# Altium PCB STM32F103C8T6-带屏幕 - Footprint.PcbDoc
Units mil, origin at the board's own origin, x right, y up, seen from the top; angles counter-clockwise.
Board outline 2100 x 700 mil, 2 copper layers (Top Layer, Bottom Layer); 5 components, 0 nets, 122 pads, 0 vias.
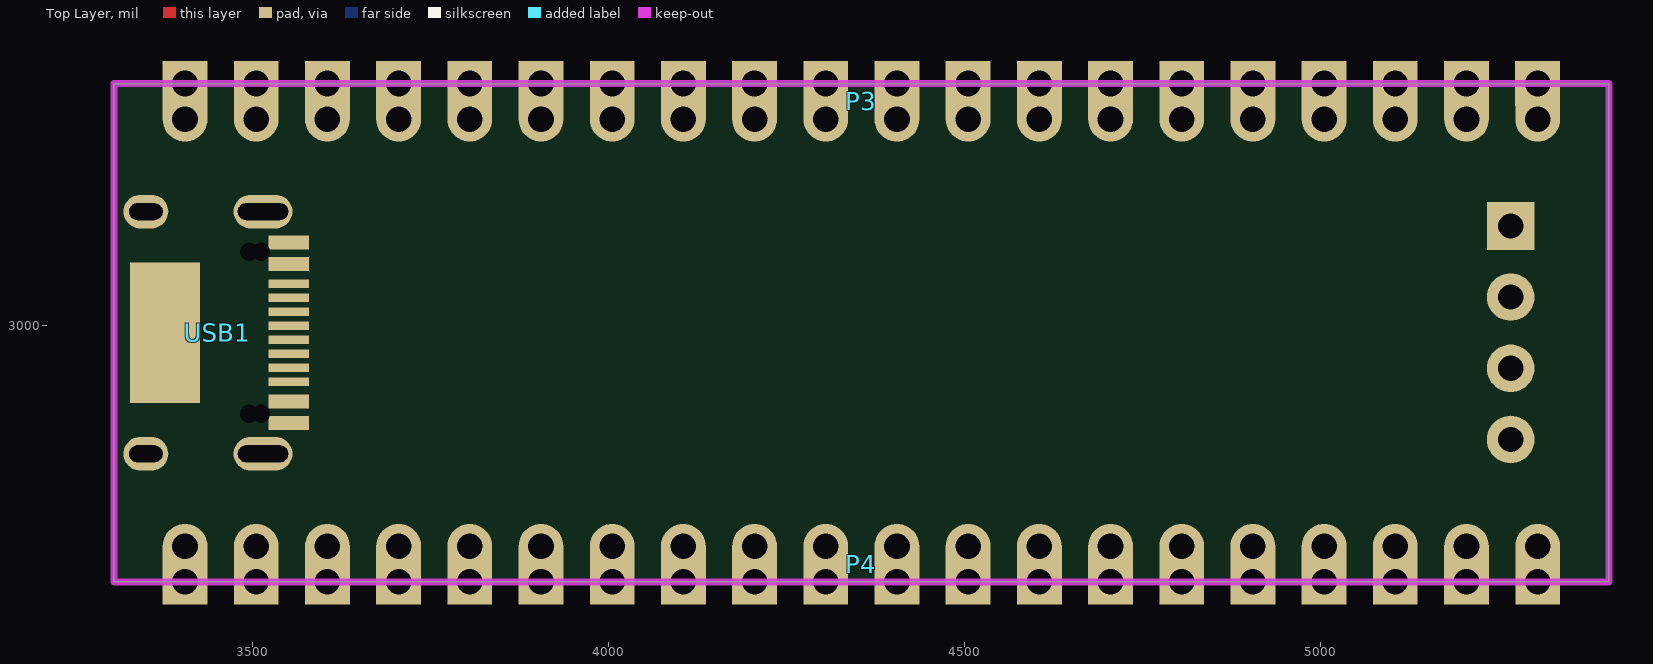
[diagram p0: Top Layer view]
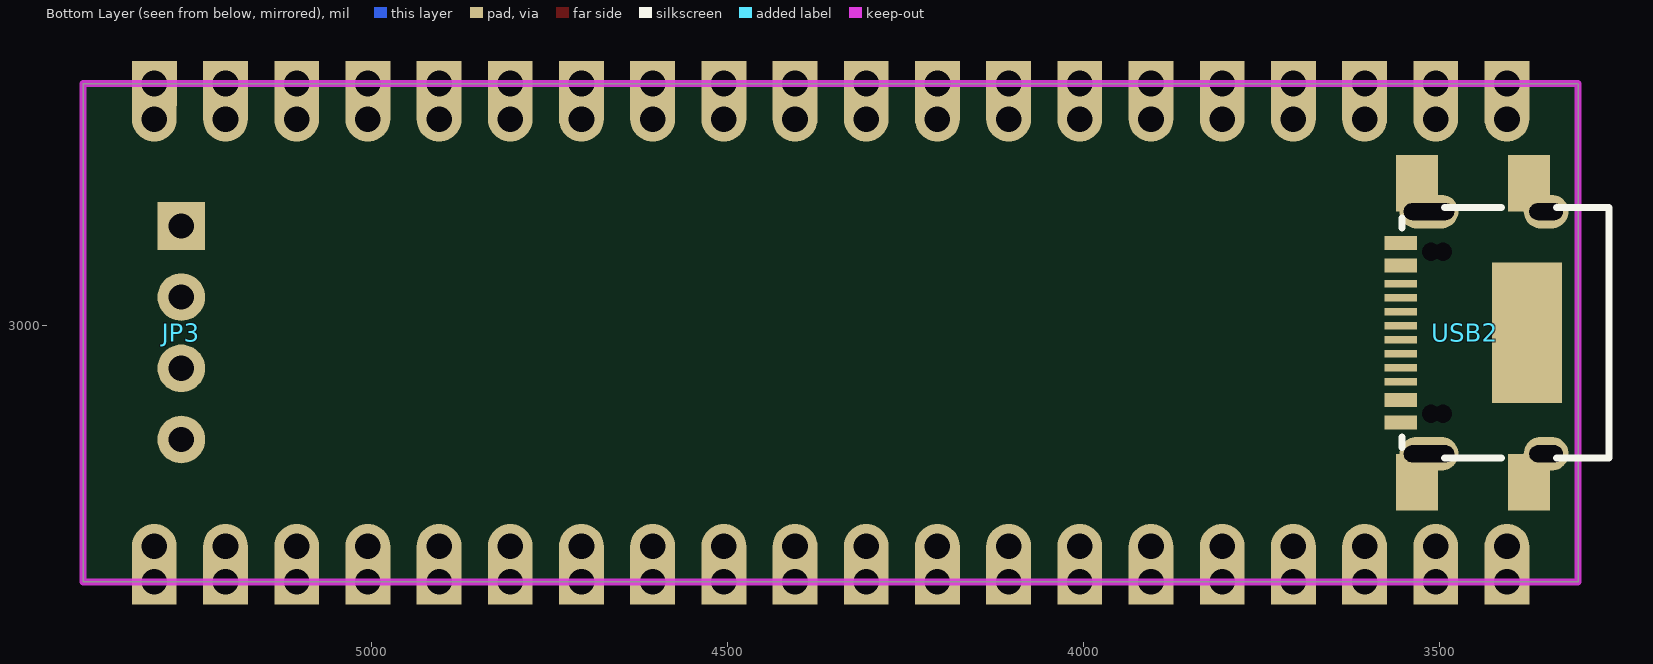
[diagram p1: Bottom Layer view, seen from below]

## Layer stack, top to bottom
Top Solder: solder mask 0.4, Solder Resist, Dk 3.5
Top Layer: signal copper 1.4
Dielectric 1: dielectric 12.6, FR-4, Dk 4.8
Bottom Layer: signal copper 1.4
Bottom Solder: solder mask 0.4, Solder Resist, Dk 3.5

## Board outline
3305,2640 3305,3340 5405,3340 5405,2640

## Design rules (kind name [scope] priority, off if disabled: settings)
Clearance [All] p1: gap=10 ignorepadtopadclearanceinfootprint=FALSE except(0: Arc-Hole Track-Hole SMDPad-Hole THPad-Hole Via-Hole Fill-Hole Poly-Hole Region-Hole Text-Hole)
PolygonConnect [All] p1: connectstyle=Relief reliefconductorwidth=10 reliefentries=4 polygonreliefangle="90 Angle" airgapwidth=10
RoutingVias [All] p1: holewidth=28 width=50 viastyle="Through Hole" minholewidth=28 minwidth=50 maxholewidth=28 maxwidth=50
SolderMaskExpansion [All] p1: expansion=4 istentingtop=FALSE
Width [All] p1: maxlimit=10 minlimit=10 preferedwidth=10
30 further rules are at their usual default settings.

## Components (designator, comment, footprint, x,y, rotation, side; value= is the part's Value field where it differs from the comment)
JP3 "NC" HDR-1X4_H 5267.09,3140 r270 bottom
P3 "H2.54 20P 直针" "1X20 PICO  HEADER" 4355,3315 r0 top
P4 "H2.54 20P 直针" "1X20 PICO  HEADER" 4355,2665 r180 top
USB1 "SMD 16P type-c" "TYPE-C 16P" 3464.68,2990 r270 top
USB2 "type-c -16" "TYPE-C 16P SMD" 3464.19,2990 r90 bottom

## Footprints (in the part's own frame and the unit in brackets; to place one, negate y for a bottom-side part, rotate by r counter-clockwise, add the part's x,y. Pads: shape width x height; smd on the part's side, far side on the other; paste and mask are expansions set on the pad)
"1X20 PICO  HEADER" [mm]
  rect 1.6x1.6 hole 0.914: 1(24.13,0.635) 2(21.59,0.635) 3(19.05,0.635) 4(16.51,0.635) 5(13.97,0.635) 6(11.43,0.635) 7(8.89,0.635) 8(6.35,0.635) 9(3.81,0.635) 10(1.27,0.635) 11(-1.27,0.635) 12(-3.81,0.635) 13(-6.35,0.635) 14(-8.89,0.635) 15(-11.43,0.635) 16(-13.97,0.635) 17(-16.51,0.635) 18(-19.05,0.635) 19(-21.59,0.635) 20(-24.13,0.635)
  oval 1.6x2.4 hole 0.914 copper offset 0,0.4: 1(24.13,-0.635) 2(21.59,-0.635) 3(19.05,-0.635) 4(16.51,-0.635) 5(13.97,-0.635) 6(11.43,-0.635) 7(8.89,-0.635) 8(6.35,-0.635) 9(3.81,-0.635) 10(1.27,-0.635) 11(-1.27,-0.635) 12(-3.81,-0.635) 13(-6.35,-0.635) 14(-8.89,-0.635) 15(-11.43,-0.635) 16(-13.97,-0.635) 17(-16.51,-0.635) 18(-19.05,-0.635) 19(-21.59,-0.635) 20(-24.13,-0.635)
HDR-1X4_H [mm] "弯脚排针，4脚"
  rect 1.7x1.7 hole 0.9: 1(0,0)
  round 1.7 hole 0.9: 2(2.54,0) 3(5.08,0) 4(7.62,0)
  body extent -1.27,-7.77 8.89,1.27, height 4.85
"TYPE-C 16P" [mm]
  oval 1.2x2.1 hole 0.6 slot 1.8 at 90 deg: 0(-4.32,1.266) 0(4.32,1.266)
  oval 1.2x1.6 hole 0.6 slot 1.2 at 90 deg: 0(-4.32,-2.914) 0(4.32,-2.914)
  rect 5x2.5 smd: 0(0,-2.227)
  round 0 hole 0.65 unplated: 6(-2.89,0.766) 7(2.89,0.766)
  rect 0.5x1.45 smd: A1/B12(-3.225,2.181) A4/B9(-2.45,2.181) B1/A12(3.225,2.181) B4/A9(2.45,2.181)
  rect 0.3x1.45 smd: A5(-1.25,2.181) A6(-0.25,2.181) A7(0.25,2.181) A8(1.25,2.181) B5(1.75,2.181) B6(0.75,2.181) B7(-0.75,2.181) B8(-1.75,2.181)
  body extent -4.45,-5.51 4.45,2.05, height 3.3
"TYPE-C 16P SMD" [mil]
  rect 79.5x59.1 smd mask+2: 0(-209.8,-90.05) 0(-209.8,67.35) 0(209.8,-90.05) 0(209.8,67.35)
  rect 196.85x98.43 smd: 0(0,-87.19)
  round 0 hole 25.59 unplated: 6(-113.8,47.65) 7(113.8,47.65)
  rect 19.7x45.3 smd mask+2: A1/B12(-126,90.05) A4/B9(-94.5,90.05) B1/A12(126,90.05) B4/A9(94.5,90.05)
  rect 10.2x45.3 smd mask+2: A5(-49.2,90.05) A6(-9.8,90.05) A7(9.8,90.05) A8(49.2,90.05) B5(68.9,90.05) B6(29.5,90.05) B7(-29.5,90.05) B8(-68.9,90.05)
  silkscreen extent -176,-202 176,88, body extent -175,-213 176,103, height 118

## Part data
JP3: library part "Header 1*4"
P3 P4: library part "Header 20", "Header, 20-Pin", LatestRevisionDate=17-Jul-2002, LatestRevisionNote="Re-released for DXP Platform.", Publisher="Altium Limited"
USB1: library part "type-c -16"

## Nets (pads, with @x,y where several pads share a name; then routed paths per layer and width w, separated by ;. In a path a pad name is that pad's centre, name@x,y a point inside that pad or via, vN(x,y) a via of type N, cw(c..) or ccw(c..) an arc to the next point about the centre after c; other vN are vias at no path point)
pads on no net: JP3.1 JP3.2 JP3.3 JP3.4 P3.1 P3.2 P3.3 P3.4 P3.5 P3.6 P3.7 P3.8 P3.9 P3.10 P3.11 P3.12 P3.13 P3.14 P3.15 P3.16 P3.17 P3.18 P3.19 P3.20 P4.1 P4.2 P4.3 P4.4 P4.5 P4.6 P4.7 P4.8 P4.9 P4.10 P4.11 P4.12 P4.13 P4.14 P4.15 P4.16 P4.17 P4.18 P4.19 P4.20 USB1.0 USB1.6 USB1.7 USB1.A1/B12 USB1.A4/B9 USB1.A5 USB1.A6 USB1.A7 USB1.A8 USB1.B1/A12 USB1.B4/A9 USB1.B5 USB1.B6 USB1.B7 USB1.B8 USB2.0 USB2.6 USB2.7 USB2.A1/B12 USB2.A4/B9 USB2.A5 USB2.A6 USB2.A7 USB2.A8 USB2.B1/A12 USB2.B4/A9 USB2.B5 USB2.B6 USB2.B7 USB2.B8

## Keep-outs
Keep-Out Layer:
  the board outline again, w10